# EAGLE board power_sch (EAGLE 9.6.2)
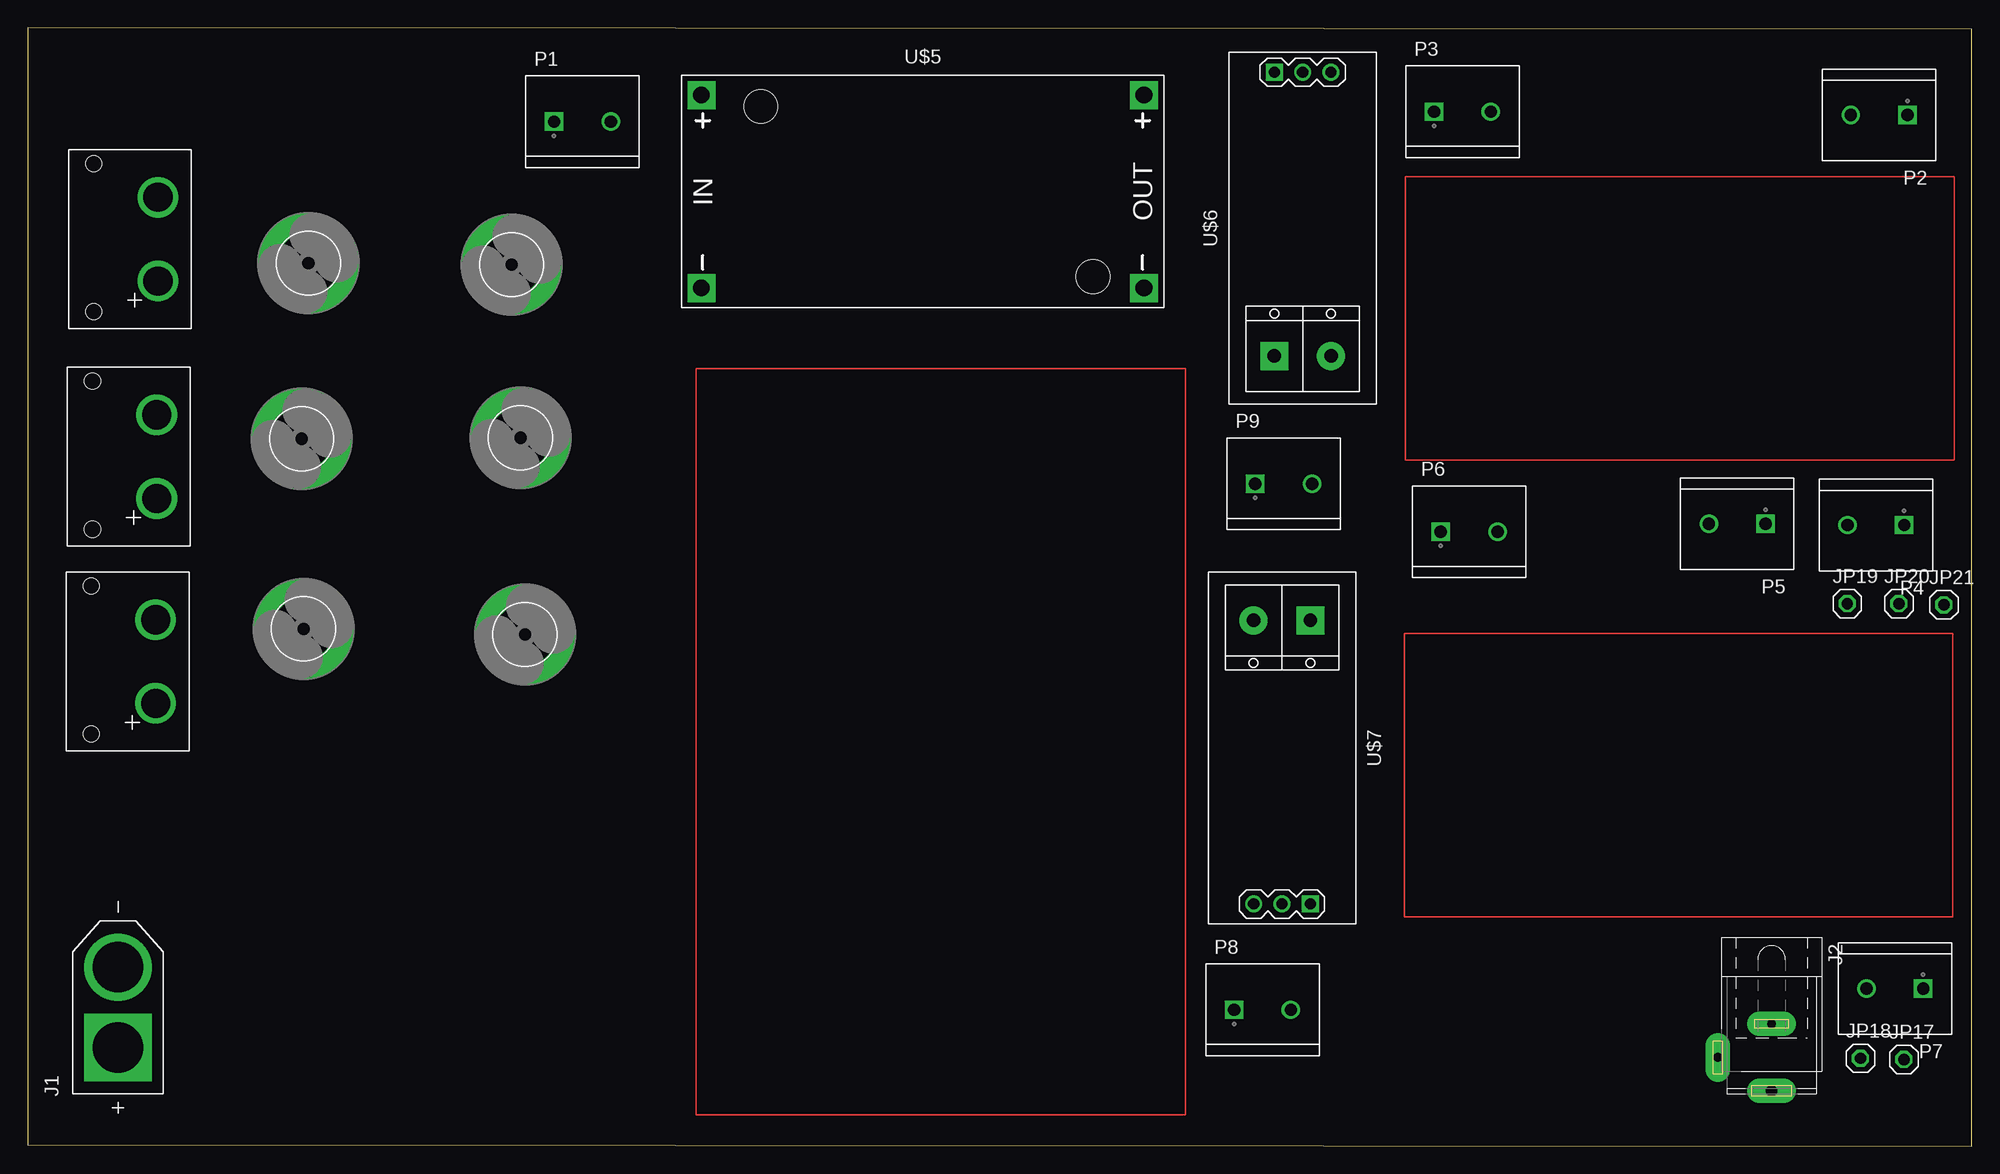
[diagram p0: board, top side]
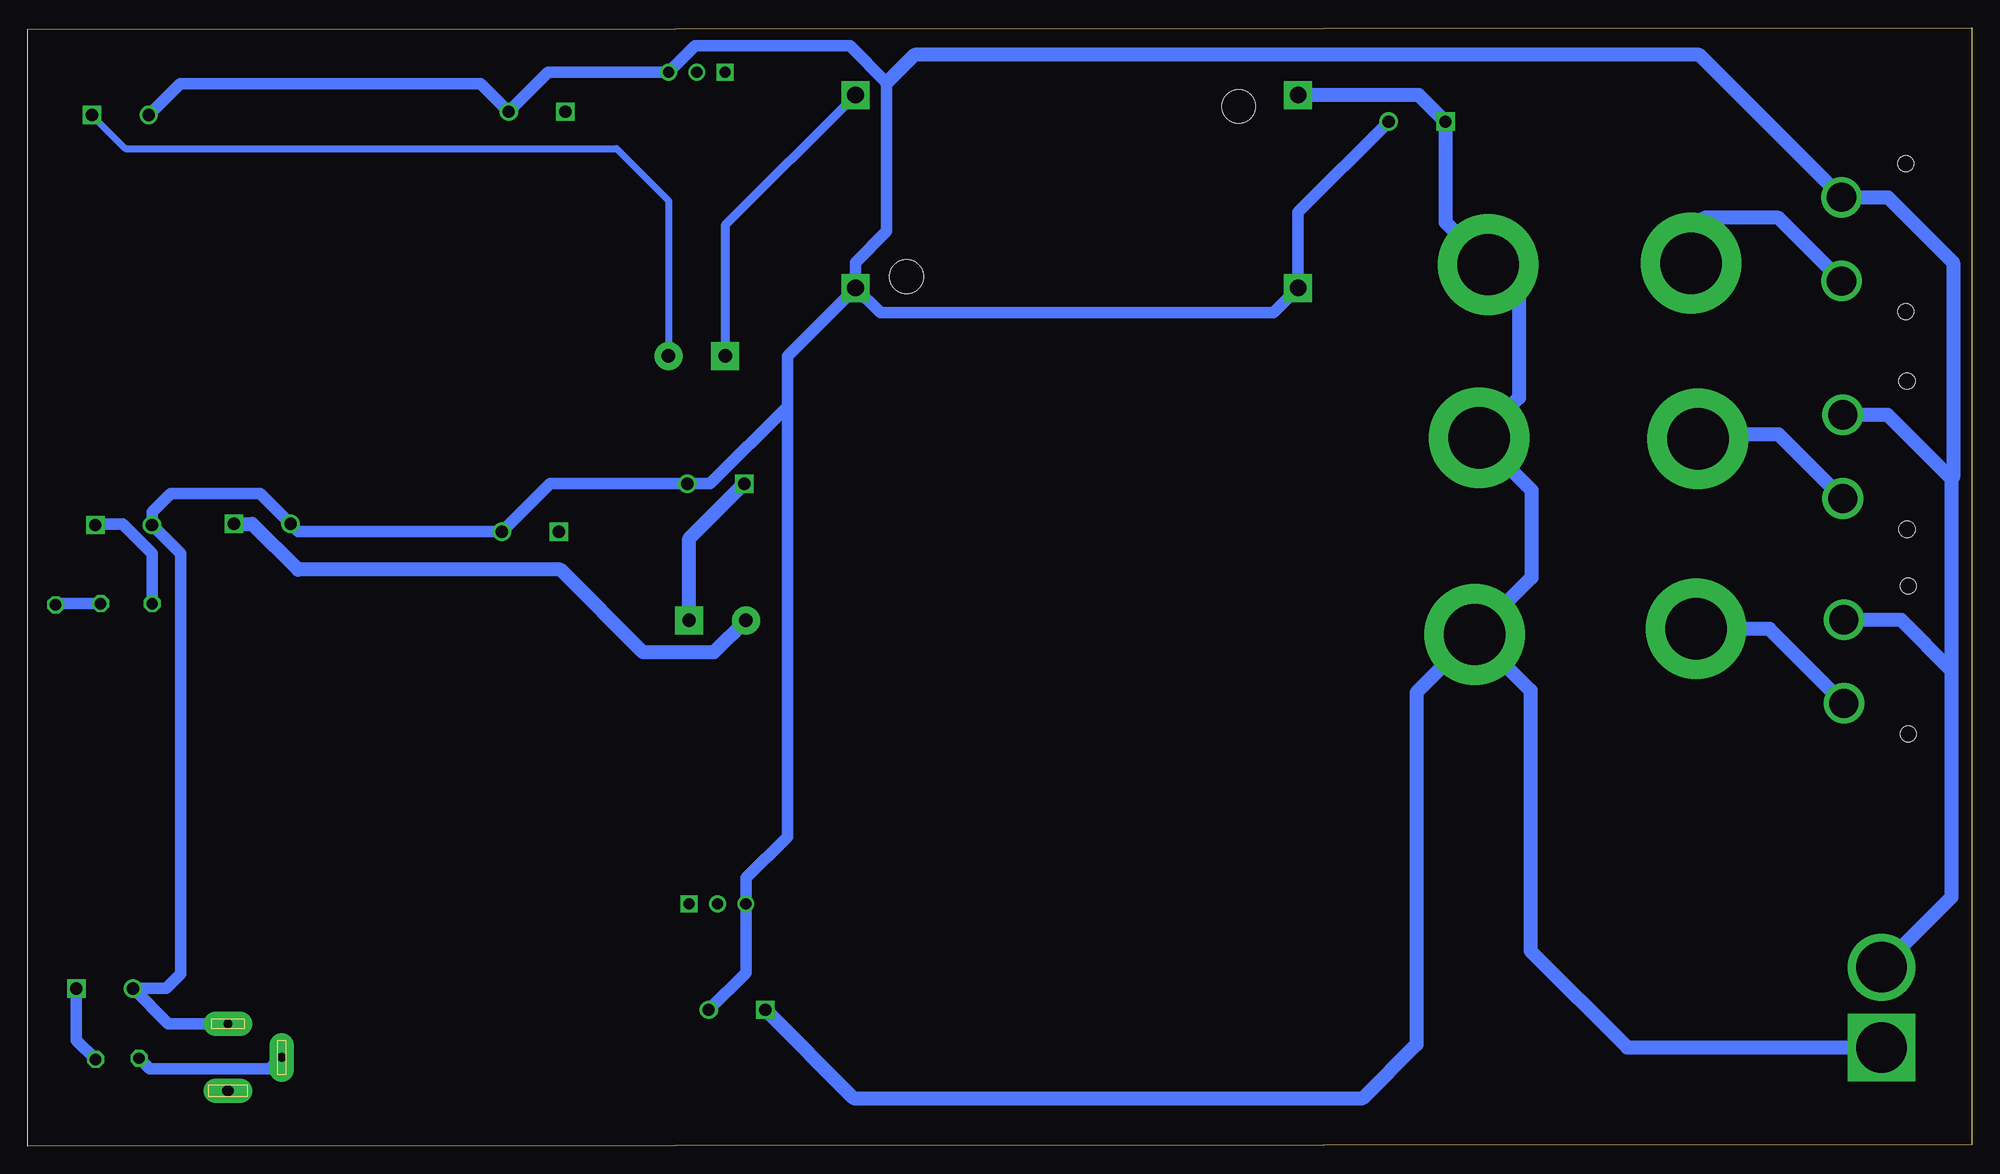
[diagram p1: board, bottom side, seen from below]

Size 173.97 x 100.1 mm. Coordinates in mm from the lower left corner, seen from the top.
Outline: 0,0.1 173.97,0 173.97,100 0,100.1 0,0.1
Copper layers (1*16): Top 0.035mm / dielectric 1.5mm / Bottom 0.035mm
Design rules "default": minimum track width 6mil, minimum drill 0.35mm, track to track 6mil, track to pad 6mil, pad to pad 6mil, via to via 6mil, smd to smd 6mil, copper to edge 40mil, drill to drill 6mil, minimum pad ring 10mil, minimum via ring 8mil, stop-mask expansion 4mil, vias tented up to drill 0mil, thermal gap 10mil

## Footprints (pad centres in the part's own frame; a part is rotated, then mirrored left to right if it is on the bottom)
5,5-PAD = drill 5.5 pad 9: B5,5 0,0
AMASS_XT60-M = drill 4.55 pad 6: N 3.6,0 | drill 4.55 pad 6 square: P -3.6,0
SPC4078 = drill 0.8 pad 2.184 long: 1 -3,0; 2 0,-4.8 | drill 1 pad 2.184 long: 3 3,0
1X01 = drill 1.016 octagon: 1 0,0
TE_282837-2 = drill 1.1 square: 1 -2.54,0 | drill 1.1: 2 2.54,0
XT60PW-M = drill 2.617: +VE 4.25,3; -VE 11.75,3 | hole 1.43: 1.5,8.75; 14.75,8.75
DC-DC-STEP-DOWN-LM2596 = drill 1.5 pad 2.5 square: IN+ -19.812,8.636; IN- -19.812,-8.636; OUT+ 19.812,8.636; OUT- 19.812,-8.636 | hole 3: -14.478,7.62; 15.24,-7.62
CURRENT-SENSOR-ACS712#IC = drill 1 square: 1 13.97,2.54 | drill 1: 2 13.97,0; 3 13.97,-2.54 | drill 1.2 pad 2.5 square: P1.1 -11.43,2.54 | drill 1.2 pad 2.5: P1.2 -11.43,-2.54

## Placement (x,y rotation side)
D1A  MOUNT-PAD-ROUND5.5  [5,5-PAD]  25.1,79.04 0 top
D1C  MOUNT-PAD-ROUND5.5  [5,5-PAD]  44.49,45.8 0 top
D2A  MOUNT-PAD-ROUND5.5  [5,5-PAD]  24.5,63.31 0 top
D2C  MOUNT-PAD-ROUND5.5  [5,5-PAD]  43.29,78.91 0 top
D3A  MOUNT-PAD-ROUND5.5  [5,5-PAD]  24.67,46.3 0 top
D3C  MOUNT-PAD-ROUND5.5  [5,5-PAD]  44.09,63.41 0 top
J1  XT60-M  [AMASS_XT60-M]  8.06,12.42 90 top
J2  [SPC4078]  156.07,7.94 270 top
JP17  [1X01]  167.91,7.76 0 top
JP18  [1X01]  164.03,7.86 0 top
JP19  [1X01]  162.85,48.56 0 top
JP20  [1X01]  167.47,48.56 0 top
JP21  [1X01]  171.49,48.46 0 top
P1  282837-2  [TE_282837-2]  49.63,91.71 0 top
P2  282837-2  [TE_282837-2]  165.7,92.3 180 top
P3  282837-2  [TE_282837-2]  128.4,92.6 0 top
P4  282837-2  [TE_282837-2]  165.4,55.6 180 top
P5  282837-2  [TE_282837-2]  153,55.7 180 top
P6  282837-2  [TE_282837-2]  129,55 0 top
P7  282837-2  [TE_282837-2]  167.1,14.1 180 top
P8  282837-2  [TE_282837-2]  110.5,12.2 0 top
P9  282837-2  [TE_282837-2]  112.4,59.3 0 top
U$1  XT60PW-M  [XT60PW-M]  14.63,73.19 90 top
U$2  XT60PW-M  [XT60PW-M]  14.53,53.72 90 top
U$3  XT60PW-M  [XT60PW-M]  14.43,35.38 90 top
U$5  DC-DC-STEP-DOWN-LM2596  [DC-DC-STEP-DOWN-LM2596]  80.09,85.46 0 top
U$6  CURRENT-SENSOR-ACS712#IC  [CURRENT-SENSOR-ACS712#IC]  114.1,82.16 90 top
U$7  CURRENT-SENSOR-ACS712#IC  [CURRENT-SENSOR-ACS712#IC]  112.25,35.64 270 top

## Library data of the parts
D1A D1C D2A D2C D3A D3C = holes
J1 = XT60-M; AVAILABILITY: Not in stock; CHECK_PRICES: https://www.snapeda.com/parts/XT60-M/AMASS/view-part/?ref=eda; DESCRIPTION: Plug; DC supply; XT60; male; PIN: 2; for cable; soldered; 30A; 500V; MF: AMASS; MP: XT60-M; PACKAGE: Package; PRICE: None; SNAPEDA_LINK: https://www.snapeda.com/parts/XT60-M/AMASS/view-part/?ref=snap
J2 = con-jack; OC_FARNELL: unknown; OC_NEWARK: unknown
JP17-JP21 = pinhead
P1-P9 = 282837-2; AVAILABILITY: In Stock; CHECK_PRICES: https://www.snapeda.com/parts/282837-2/TE+Connectivity+AMP+Connectors/view-part/?ref=eda; COMMENT: 282837-2; DESCRIPTION: Terminal Block Connector Wire Receptacle 2 5.08 mm 30-16 AWG Green 13.5 A 250 V | TE Connectivity 282837-2; MF: TE Connectivity; MP: 282837-2; PACKAGE: None; PRICE: None; PURCHASE-URL: https://www.snapeda.com/api/url_track_click_mouser/?unipart_id=2549980&manufacturer=TE Connectivity&part_name=282837-2&search_term=None; SNAPEDA_LINK: https://www.snapeda.com/parts/282837-2/TE+Connectivity+AMP+Connectors/view-part/?ref=snap
U$1-U$3 = Tiburon
U$5-U$7 = diy-modules

## Nets
0V: J1.N J2.1 P1.2 P2.2 P3.2 P4.2 P5.2 P6.2 P7.2 P8.2 P9.2 U$1.-VE U$2.-VE U$3.-VE U$5.IN- U$5.OUT- U$6.3 U$7.3
8V: U$5.OUT+ U$6.P1.1
8V_1: P2.1 U$6.P1.2
16.8V: D1C.B5,5 D2C.B5,5 D3C.B5,5 J1.P P1.1 P8.1 U$5.IN+
19V: P9.1 U$7.P1.1
19V_1: P5.1 U$7.P1.2
A0: U$6.2
A1: U$7.2
B_1: D1A.B5,5 U$1.+VE
B_2: D2A.B5,5 U$2.+VE
B_3: D3A.B5,5 U$3.+VE
DEBUG_01: P3.1
DEBUG_02: P6.1
FUSE_1: JP19.1 P4.1
FUSE_2: JP17.1 P7.1
FUSE_12: JP20.1 JP21.1
FUSE_21: J2.2 JP18.1
NUC: J2.3
VCC: U$7.1
VCC_1: U$6.1

## Tracks (layer width: path | path; a pad name or v marks a point on that pad's centre or on a via)
0V
  Bottom 1.016: P8.2 109.71,15.53 U$7.3 109.71,23.99 106,27.7 106,66.2 | J2.1 161.4,10.94 P7.2 161.6,14.1 160.3,15.4 160.3,53.04 P4.2 162.86,56.74 161.2,58.4 153.16,58.4 P5.2 149.76,55 P6.2 127.24,59.3 P9.2 112.9,59.3 106,66.2 | P2.2 160.36,95.1 133.44,95.1 P3.2 127.41,96.13 U$6.3 114.27,98.5 100.4,98.5 97.1,95.2 97.1,81.9 99.9,79.1 U$5.OUT- | U$5.OUT- 97.68,74.6 62.5,74.6 U$5.IN- 60.28,83.6 P1.2 | U$5.OUT- 106,70.73 106,66.2
  Bottom 1.27: U$2.-VE 7.53,65.47 1.8,59.74 | U$3.-VE 6.33,47.13 1.8,42.6 | 1.8,42.6 1.8,22.28 J1.N | 1.8,59.74 1.8,42.6 | 1.8,59.74 1.65,59.89 1.65,79.1 7.49,84.94 U$1.-VE 24.39,97.69 94.61,97.69 97.1,95.2
8V
  Bottom 0.813: U$5.OUT+ 111.56,82.44 U$6.P1.1
8V_1
  Bottom 0.61: P2.1 165.24,89.3 121.3,89.3 116.64,84.64 U$6.P1.2
16.8V
  Bottom 1.27: U$5.IN+ 49.48,94.1 P1.1 47.09,82.71 D2C.B5,5 40.5,76.12 40.5,67 D3C.B5,5 39.4,58.72 39.4,50.89 D1C.B5,5 | D1C.B5,5 39.49,40.8 39.49,17.49 30.82,8.82 J1.P | D1C.B5,5 49.69,40.6 49.69,9.1 54.49,4.3 100.06,4.3 P8.1
19V
  Bottom 1.27: U$7.P1.1 114.79,54.37 P9.1
19V_1
  Bottom 1.27: U$7.P1.2 112.58,44.2 118.9,44.2 126.3,51.6 149.8,51.6 153.9,55.7 P5.1
B_1
  Bottom 1.27: U$1.+VE 17.29,83.1 23.9,83.1 25.1,81.9 D1A.B5,5
B_2
  Bottom 1.27: U$2.+VE 17.26,63.7 24.11,63.7 D2A.B5,5
B_3
  Bottom 1.27: U$3.+VE 18.1,46.3 D3A.B5,5
FUSE_1
  Bottom 1.016: JP19.1 162.85,53.05 165.5,55.7 167.84,55.7 P4.1
FUSE_2
  Bottom 1.016: P7.1 169.64,9.49 JP17.1
FUSE_12
  Bottom 1.016: JP20.1 171.39,48.56 JP21.1
FUSE_21
  Bottom 1.016: J2.2 152.31,6.9 163.07,6.9 JP18.1
N$1
  Top 0.152: 59.8,69.6 59.8,2.8 103.6,2.8 103.6,69.6 59.8,69.6
N$2
  Top 0.152: 123.3,61.4 123.3,86.8 172.4,86.8 172.4,61.4 123.3,61.4
N$8
  Top 0.152: 123.2,20.5 123.2,45.9 172.3,45.9 172.3,20.5 123.2,20.5